# Altium PCB Ethylene Sensor Rev3.PcbDoc
Units mil, origin at the board's own origin, x right, y up, seen from the top; angles counter-clockwise.
Board outline 1745 x 1540 mil, 2 copper layers (Top Layer, Bottom Layer); 24 components, 17 nets, 76 pads, 19 vias.
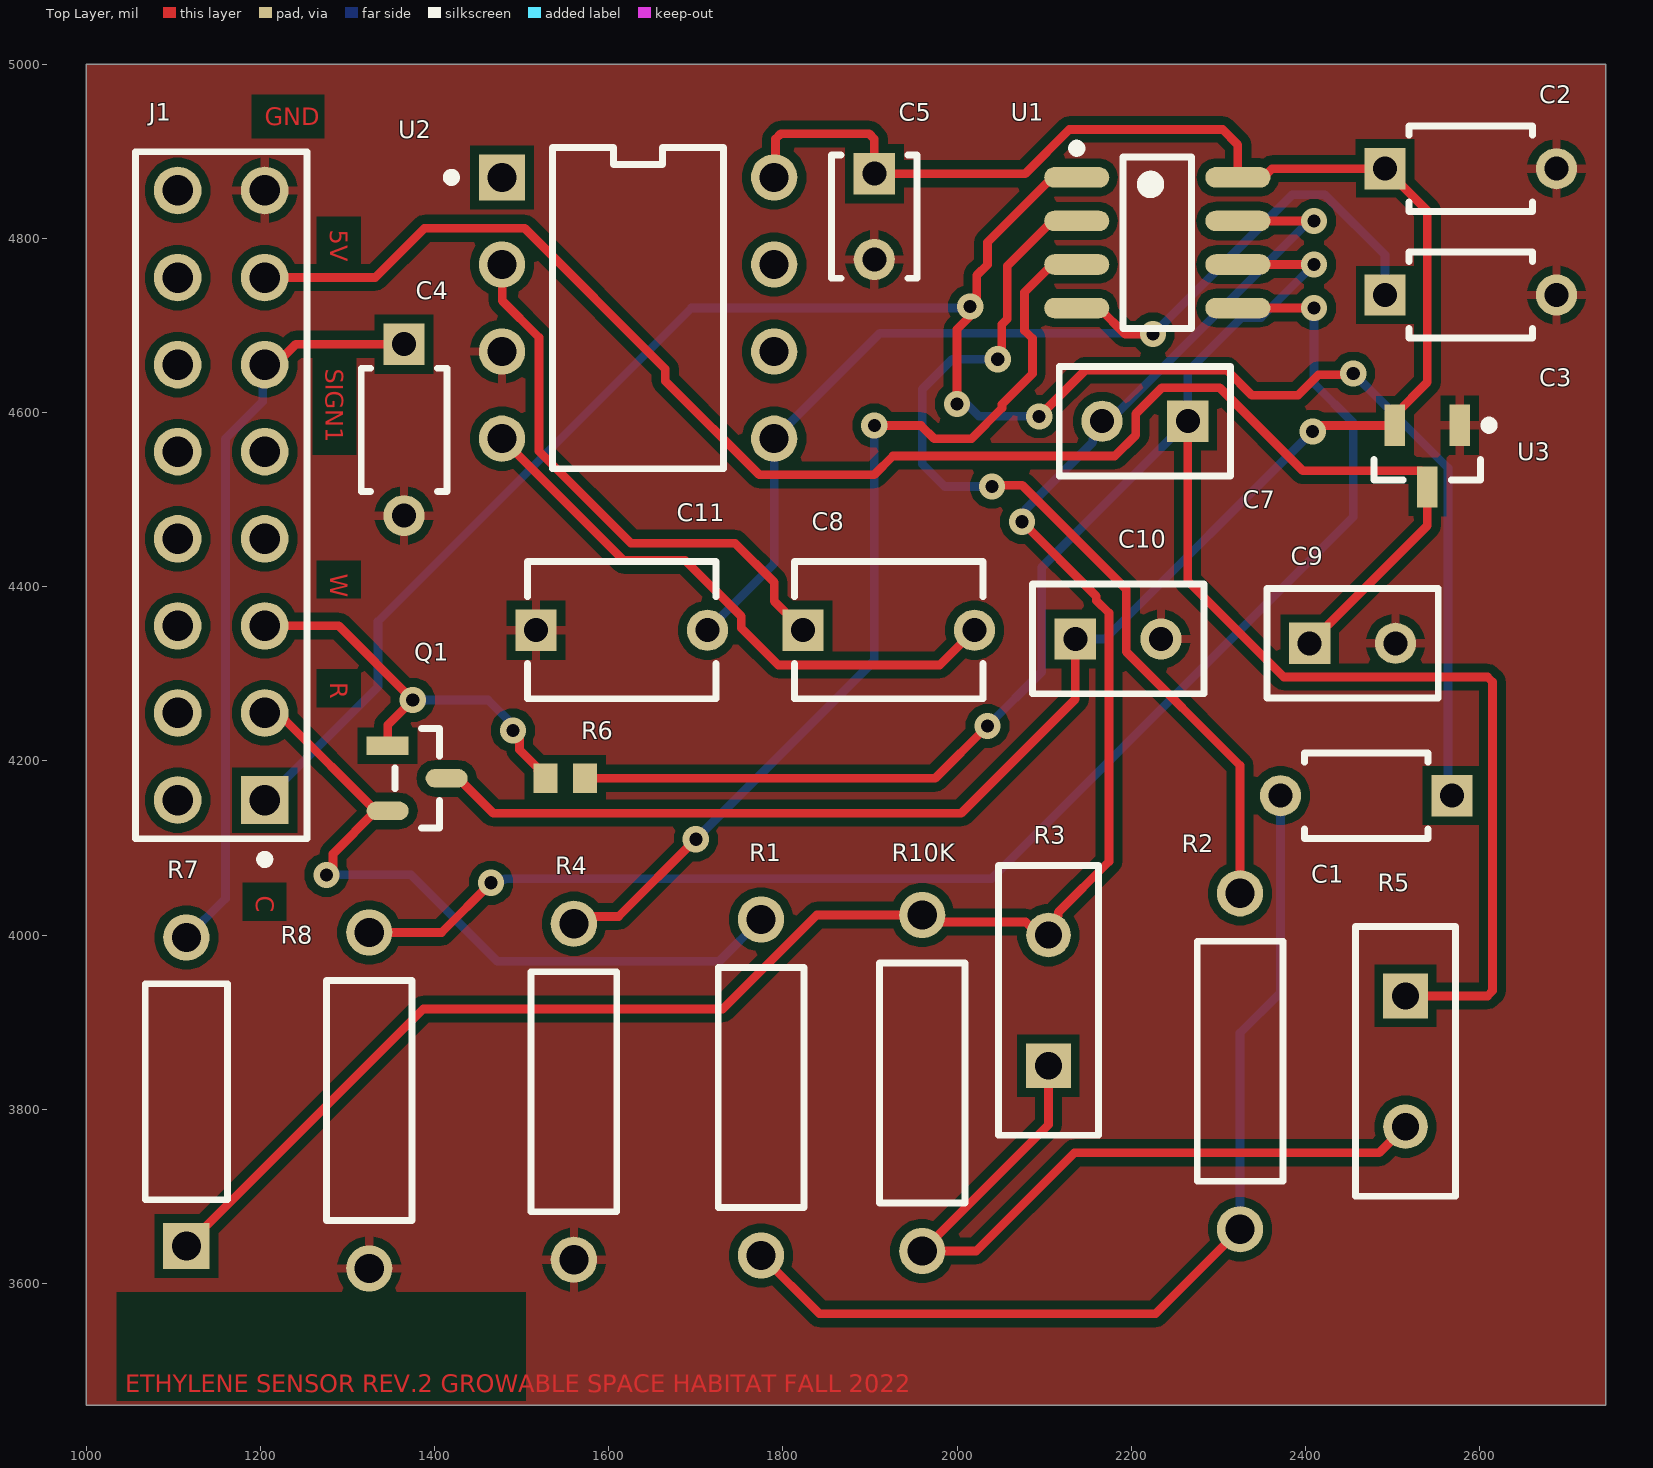
[diagram p0: Top Layer view]
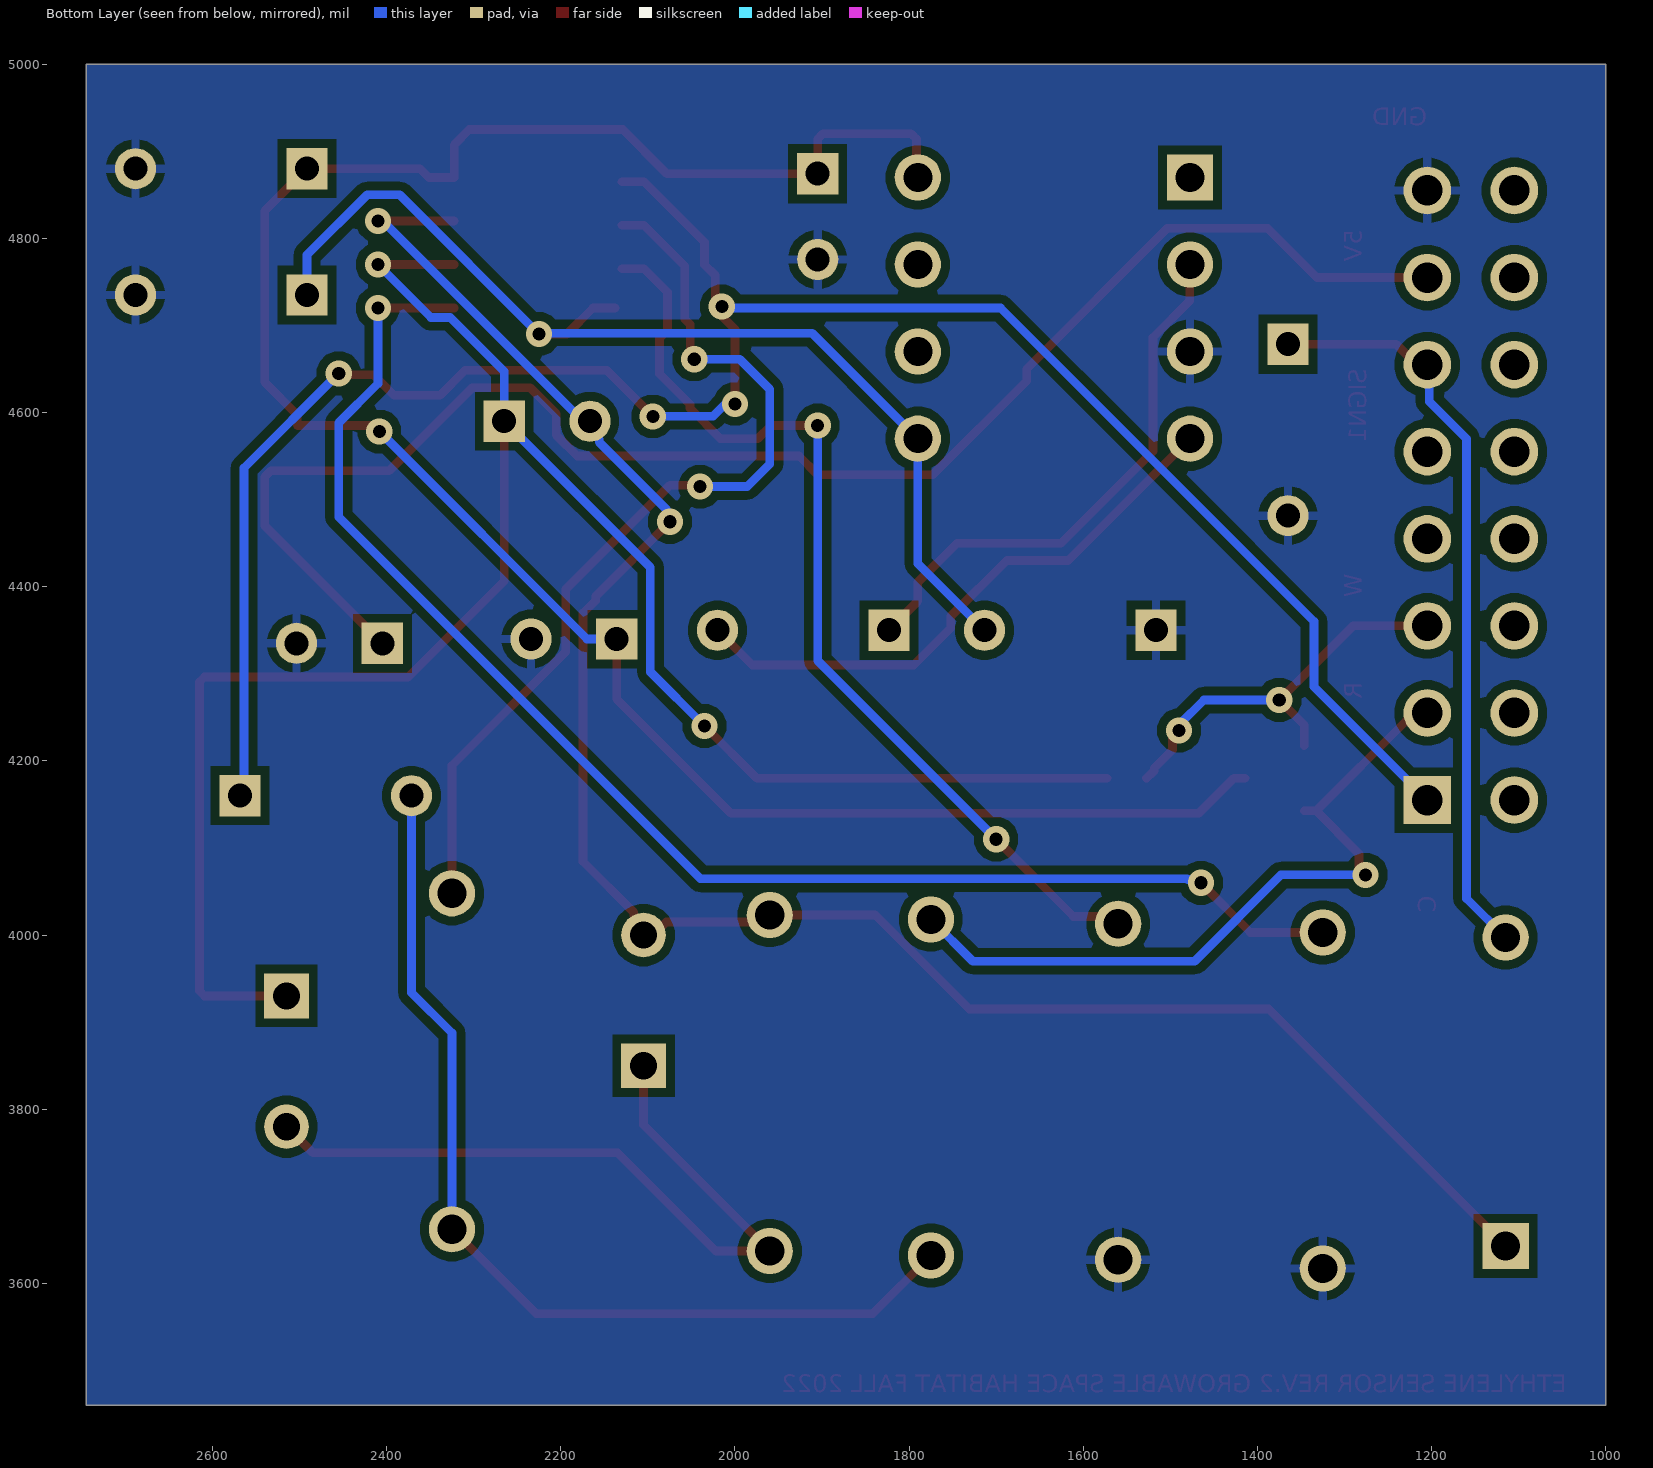
[diagram p1: Bottom Layer view, seen from below]
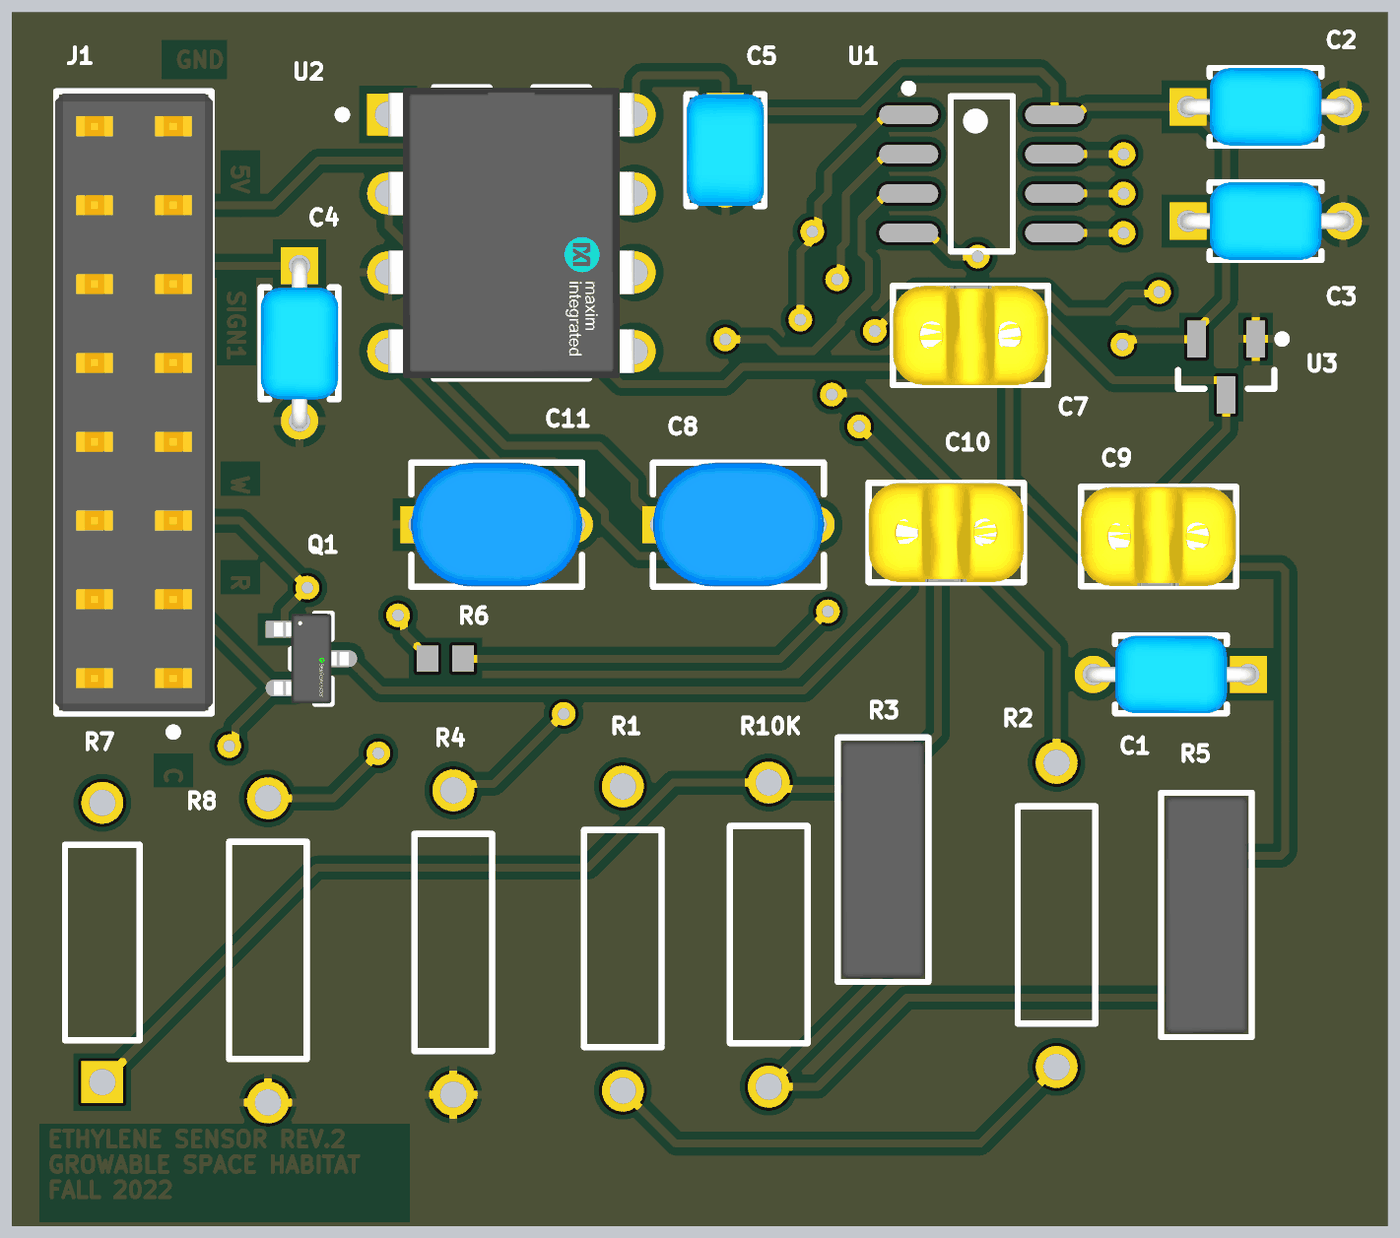
[diagram p2: 3D render of the assembled board from above, using the file's embedded part models]

## Layer stack, top to bottom
Top Solder: solder mask 0.4, Solder Resist, Dk 3.5
Top Layer: signal copper 1.4
Dielectric 1: dielectric 12.6, FR-4, Dk 4.8
Bottom Layer: signal copper 1.4
Bottom Solder: solder mask 0.4, Solder Resist, Dk 3.5

## Board outline
1000,5000 1000,3460 2745,3460 2745,5000

## Design rules (kind name [scope] priority, off if disabled: settings)
Clearance [All] p1: gap=10 ignorepadtopadclearanceinfootprint=FALSE except(0: Arc-Hole Track-Hole SMDPad-Hole THPad-Hole Via-Hole Fill-Hole Poly-Hole Region-Hole Text-Hole)
MinimumSolderMaskSliver [All] p1: minsoldermaskwidth=9.5
PolygonConnect [All] p1: connectstyle=Relief reliefconductorwidth=10 reliefentries=4 polygonreliefangle="90 Angle" airgapwidth=10
RoutingVias [All] p1: holewidth=15 width=30 viastyle="Through Hole" minholewidth=15 minwidth=30 maxholewidth=15 maxwidth=30
SolderMaskExpansion [All] p1: expansion=4 istentingtop=FALSE
Width [All] p1: maxlimit=10 minlimit=10 preferedwidth=10
29 further rules are at their usual default settings.

## Components (designator, comment, footprint, x,y, rotation, side; value= is the part's Value field where it differs from the comment)
C1 ".1uF/100pF" FP-RCE0K1-MFG 2470,4160 r180 top
C2 ".1uF/100pF" FP-RCE0K1-MFG 2590,4880 r0 top
C3 ".1uF/100pF" FP-RCE0K1-MFG 2590,4735 r0 top
C4 ".1uF/100pF" FP-RCE0K1-MFG 1365,4580 r270 top
C5 "100pF/.1uF" FP-RCE0DB-MFG 1905,4825 r270 top
C7 "1uF" FP-K105Z20Y5VF5TL2-MFG 2215.79,4590 r180 top
C8 "10uF" FP-RCE3M1-MFG 1921.57,4350 r0 top
C9 "1uF" FP-K105Z20Y5VF5TL2-MFG 2454.21,4335 r0 top
C10 "1uF" FP-K105Z20Y5VF5TL2-MFG 2185,4340 r0 top
C11 "10uF" FP-RCE3M1-MFG 1615,4350 r0 top
J1 "87227-8" FP-87227-8-MFG 1155,4505 r90 top
Q1 "J177" FP-318-08-IPC_C 1380,4180 r0 top
R1 "10k" OMTE-RES7X2.5-2 1775,3825 r270 top
R2 "10k" OMTE-RES7X2.5-2 2325,3855 r90 top
R3 "20k" FP-S102K-MFG 2105,3925 r90 top
R4 "10k" OMTE-RES7X2.5-2 1560,3820 r90 top
R5 "20k" FP-S102K-MFG 2515,3855 r270 top
R6 "47" RESC1609X50X30LL10T20 1550,4180 r0 top
R7 "100k" RESA60-630X240 1115,3820 r90 top
R8 "10k" OMTE-RES7X2.5-2 1325,3810 r90 top
R10K "10k" OMTE-RES7X2.5-2 1960,3830 r90 top
U1 "AD8572ARZ" ADI-R-8_L 2230,4795 r0 top
U2 "MAX660CPA+" FP-P8-2-MFG 1633.7,4720 r0 top
U3 "MCP1700T-3002E/TT" SOT-23-TT3_L 2540,4550 r270 top

## Footprints (in the part's own frame and the unit in brackets; to place one, negate y for a bottom-side part, rotate by r counter-clockwise, add the part's x,y. Pads: shape width x height; smd on the part's side, far side on the other; paste and mask are expansions set on the pad)
ADI-R-8_L [mm] "SOIC, 8-Leads, Body 4.9x3.9mm, Pitch 1.27mm, IPC High Density"
  oval 1.9x0.6 smd: 1(-2.35,1.905) 2(-2.35,0.635) 3(-2.35,-0.635) 4(-2.35,-1.905) 5(2.35,-1.905) 6(2.35,-0.635) 7(2.35,0.635) 8(2.35,1.905)
  silkscreen extent -2.47,-2.5 1,2.88, body extent -2,-2.5 2,2.5, height 1.75
FP-318-08-IPC_C [mm]
  rect 1.224x0.538 smd paste+0 mask+0: 1(-0.86,0.95)
  rrect100% 1.224x0.538 smd paste+0 mask+0: 2(-0.86,-0.95) 3(0.86,0)
  silkscreen extent -0.65,-1.45 0.65,1.45, body extent -1.57,-1.55 1.57,1.55, height 0.25
FP-87227-8-MFG [mil]
  rect 54.69x54.69 hole 35 paste-39370.1 mask+0: 1(-350,-50)
  round 54.69 hole 35 paste-39370.1 mask+0: 2(-350,50) 3(-250,-50) 4(-250,50) 5(-150,-50) 6(-150,50) 7(-50,-50) 8(-50,50) 9(50,-50) 10(50,50) 11(150,-50) 12(150,50) 13(250,-50) 14(250,50) 15(350,-50) 16(350,50)
  silkscreen extent -423,-99 394,99, body extent -398,-102 398,102, height 10
FP-K105Z20Y5VF5TL2-MFG [mm]
  rect 1.2x1.2 hole 0.7 paste-1000 mask+0: 1(-1.25,0)
  round 1.2 hole 0.7 paste-1000 mask+0: 2(1.25,0)
  silkscreen extent -2.5,-1.6 2.5,1.6, body extent -2.6,-1.7 2.6,1.7, height 0.25
FP-P8-2-MFG [mm]
  rect 1.35x1.35 hole 0.85 paste-1000 mask+0: 1(-3.97,3.81)
  round 1.35 hole 0.85 paste-1000 mask+0: 2(-3.97,1.27) 3(-3.97,-1.27) 4(-3.97,-3.81) 5(3.97,-3.81) 6(3.97,-1.27) 7(3.97,1.27) 8(3.97,3.81)
  silkscreen extent -5.57,-4.69 2.49,4.69, body extent -4.74,-5.13 4.74,5.13, height 0.25
FP-RCE0DB-MFG [mm]
  rect 1.2x1.2 hole 0.7 paste-1000 mask+0: 1(-1.25,0)
  round 1.2 hole 0.7 paste-1000 mask+0: 2(1.25,0)
  silkscreen extent -1.8,-1.25 1.8,1.25, body extent -1.95,-1.35 1.95,1.35, height 0.25
FP-RCE0K1-MFG [mm]
  rect 1.2x1.2 hole 0.7 paste-1000 mask+0: 1(-2.5,0)
  round 1.2 hole 0.7 paste-1000 mask+0: 2(2.5,0)
  silkscreen extent -1.8,-1.25 1.8,1.25, body extent -3.2,-1.35 3.2,1.35, height 0.25
FP-RCE3M1-MFG [mm]
  rect 1.2x1.2 hole 0.7 paste-1000 mask+0: 1(-2.5,0)
  round 1.2 hole 0.7 paste-1000 mask+0: 2(2.5,0)
  silkscreen extent -2.75,-2 2.75,2, body extent -3.2,-2.1 3.2,2.1, height 0.25
FP-S102K-MFG [mm]
  rect 1.3x1.3 hole 0.8 paste-1000 mask+0: 1(-1.905,0)
  round 1.3 hole 0.8 paste-1000 mask+0: 2(1.905,0)
  silkscreen extent -3.94,-1.46 3.94,1.46, body extent -4.04,-1.56 4.04,1.56, height 0.25
OMTE-RES7X2.5-2 [mm] "Resistor, Axial; Body 7x2.5mm, Lead Dia. 0.6mm"
  round 1.35 hole 0.85: 1(-4.9,0) 2(4.9,0)
  silkscreen extent -3.5,-1.25 3.5,1.25, body extent -3.5,-1.25 3.5,1.25, height 2.5
RESA60-630X240 [mm] "Axial Resistor, 2-Leads, Dia 2.4mm, Body Length 6.3mm"
  rect 1.35x1.35 hole 0.85: 1(-4.5,0)
  round 1.35 hole 0.85: 2(4.5,0)
  silkscreen extent -3.15,-1.2 3.15,1.2, body extent -3.15,-1.2 3.15,1.2, height 2.4
RESC1609X50X30LL10T20 [mm] "Chip Resistor, 2-Leads, Body 1.55x0.85mm, IPC High Density"
  rect 0.7x0.85 smd: 1(-0.575,0) 2(0.575,0)
  body extent -0.82,-0.48 0.82,0.48, height 0.5
SOT-23-TT3_L [mm] "SOT23, 3-Leads, Body 2.9x1.3mm, Pitch 0.95mm, Lead Span 2.4mm, IPC High Density"
  rect 1.2x0.6 smd: 1(-0.9,0.95) 2(-0.9,-0.95) 3(0.9,0)
  silkscreen extent -1.02,-1.55 0.7,1.93, body extent -0.7,-1.52 0.7,1.53, height 1.12

## Part data
C1 C2 C3 C4: library part CMP-06035-023108-1, "Cap Ceramic 100pF 100V C0G ±5% Radial 5mm +125°C Automotive Bulk", Capacitance=100pF, Case/Package=Radial, Dielectric=C0G, Max Operating Temperature=125°C, Min Operating Temperature=-55°C, Package Quantity=2000, Ratings=AEC-Q200, Resistor Type=Ceramic, Tolerance=5%, Voltage Rating=100V, Height=3.5mm, Height - Seated (Max)=0.138inch, Lead Diameter=0.5mm, Lead Pitch=0.197inch, Lead/Base Style="Formed Leads", Length=0.142inch, Mount="Through Hole", Packaging="Tape and Reel", Termination=Radial, Voltage Rating (DC)=100V, Width=0.098inch
C5: library part CMP-06035-022164-1, "Cap Ceramic 100pF 100V C0G ±5% Radial 2.5mm +125°C Ammo Pack", Capacitance=100pF, Case/Package=Radial, Dielectric=C0G, Max Operating Temperature=125°C, Min Operating Temperature=-55°C, Package Quantity=2000, Ratings=AEC-Q200, Resistor Type=Ceramic, Tolerance=5%, Voltage Rating=100V, Height=3.5mm, Height - Seated (Max)=0.138inch, Lead Diameter=0.5mm, Lead Pitch=0.098inch, Lead/Base Style=Straight, Length=0.142inch, Mount="Through Hole", Packaging="Tape and Reel", Termination=Radial, Voltage Rating (DC)=100V, Width=0.098inch
C7 C9 C10: library part CMP-02417-000003-1, "CAP CER 1UF 50V Y5V RADIAL", Manufacturer="Vishay BC Components", Manufacturer Part Number=K105Z20Y5VF5TL2, Temperature="-30°C to +85°C", Temperature Characteristic=Y5V, Temperature Range High=+85°C, Temperature Range Low=-30°C, Tolerance=-20+80%, Voltage Rating=50V, Automotive=No, Capacitance=1uF, Category=Cap, ComponentLink2Description=Datasheet, ComponentLink2URL=https://www.vishay.com/docs/45171/kseries.pdf, Device Class L1="Passive Components", Device Class L2=Capacitors, Device Class L3="Ceramic Capacitors", Digikey Description="CAP CER 1UF 50V Y5V RADIAL", Height=6.6mm, Lead Free=Yes, Material=Ceramic, Mouser Description="Multilayer Ceramic Capacitors MLCC - Leaded 1uF 50volts +80/-20% Y5V 2.5mm LS", Octopart=https://octopart.com/k105z20y5vf5tl2-vishay-39475252, Package=K105Z20Y5VF5TL2, RoHS=TRUE
C8 C11: library part CMP-06035-005744-1, "Cap Ceramic 10uF 25V X7R ±10% Radial 5mm +125°C Automotive Ammo Pack", Case/Package=Radial, Dielectric=X7R, Max Operating Temperature=125°C, Min Operating Temperature=-55°C, Package Quantity=1500, Ratings=AEC-Q200, Resistor Type=Ceramic, Tolerance=10%, Voltage Rating=25V, Capacitance=10uF, Height=5mm, Height - Seated (Max)=0.197inch, Lead Diameter=0.5mm, Lead Pitch=0.197inch, Lead/Base Style="Formed Leads", Length=0.217inch, Mount="Through Hole", Packaging="Tape and Reel", Termination=Radial, Voltage Rating (DC)=25V, Width=0.157inch
J1: library part CMP-03369-000064-1, "CONN HEADER VERT 16POS 2.54MM", Current Rating=3A, Manufacturer="TE Connectivity", Package=0, Temperature="-65°C to +105°C", Temperature Range High=+105°C, Temperature Range Low=-65°C, Automotive=No, Category=Conn, ComponentLink2Description=Datasheet, ComponentLink2URL=https://www.te.com/usa-en/product-87227-8.datasheet.pdf, Conn Gender=Male, Conn Orientation=Straight, Contact Material=Gold,Nickel, Device Class L1=Connectors, Device Class L2="Headers and Wire Housings", Device Class L3=unset, Digikey Description="CONN HEADER VERT 16POS 2.54MM", Footprint Url=https://www.te.com/commerce/DocumentDelivery/DDEController?Action=showdoc&DocId=Customer+Drawing%7F87227%7FH4%7Fpdf%7FEnglish%7FENG_CD_87227_H4.pdf%7F87227-8, Height=0.428inch, Lead Free=Yes, Manufacturer Part Number=87227-8, Mouser Description="Headers & Wire Housings UNSHRD VERT DUAL 16", Number of Contacts=16, Number of Rows=2, Octopart=https://octopart.com/87227-8-te+connectivity-39407754, Pitch=2.54mm, RoHS=TRUE
Q1: library part CMP-1062-00047-2, "JFET P-CH 30V 0.225W SOT23", Breakdown Voltage=30V, Case/Package=SOT-23-3, Continuous Drain Current (ID)=20mA, Current Rating=-20mA, Drain to Source Resistance=300R, Drain to Source Voltage (Vdss)=25V, Input Capacitance=11pF, Max Operating Temperature=150°C, Max Power Dissipation=225mW, Min Operating Temperature=-55°C, Package Quantity=1, Voltage Rating (DC)=-25V, Contact Plating=Tin, Element Configuration=Single, Gate to Source Voltage (Vgs)=25V, Halogen Free="Halogen Free", Height=1.01mm, Lead Free="Lead Free", Length=3.04mm, Number of Pins=3, Packaging="Tape and Reel", Power Dissipation=225mW, Radiation Hardening=No, REACH SVHC="No SVHC", Weight=0.050717oz, Width=1.4mm
R1 R2 R4 R8 R10K: library part CMP-2000-06865-1, "Little Demon(R) Carbon Composition Molded OD Series, 250 V, 10 KOhm, +/-5%, -70 to 130 degC, 2-Pin THD, RoHS, Bulk", Manufacturer=Ohmite, Operating Temperature=-, Package / Case=Axial, Package Description="2-Pin THD Resistor, Body 7 x 2.5 mm, Lead Dia. 0.6 mm", Package Reference=RES7X2.5, PartNumber=OD103JE, Power (Watts)=0.25W,1/4W, Power Rating=0.25W, Standard Package=100, Tolerance=±5%, Catalog Drawings=OD,OF,OASeries, Category=Resistors, Composition=CarbonComposition, Datasheet URL=http://www.ohmite.com/cat/res_od_of_oa.pdf, Datasheet Version=06/2016, EDA / CAD Models=DownloadfromAcceleratedDesigns, Family=ThroughHoleResistors, Features=PulseWithstanding, Height=-, Manufacturer URL=http://www.ohmite.com/, Mounting Technology=ThroughHole, Number of Terminations=2, Online Catalog=OD,OF,OASeries,LittleDemon®, Packaging=Bulk, Resistance (Ohms)=10k, RoHS Information="LittleDemon\"E\"SeriesMaterialDeclaration", Series=LittleDemon®OD, Size / Dimension="0.098\"Diax0.276\"L(2.50mmx7.00mm)", Supplier Device Package=Axial, Temperature Coefficient=-
R3 R5: library part CMP-10850-000015-1, "RES 20K OHM 0.6W 0.01% RADIAL", Case/Package=Radial, Power Rating=600mW, Resistance=20kR, Resistance Tolerance=0.01%, Resistor Type="Metal Foil", Temperature Coefficient=1ppm/°C, Voltage Rating=300V, Mount="Through Hole", RoHS Compliant=Yes, Tolerance=0.01%
R6: library part CMP-2000-03383-1, Manufacturer="Vishay Dale", Part Number=CRCW060347R0FKEA
R7: library part CMP-1659-00073-1, "Axial Resistor, 100 KOhm, +/- 1%, 0.25 W, -55 to 155 degC, 2-Pin THD, RoHS, Bulk", Case\Package=Axial, Max Operating Temperature="155 degC", Min Operating Temperature="-55 degC", Package Quantity=200, Power Rating="250 mW", Resistance="475 Ohm", Tolerance=1%, Voltage Rating="250 V", ComponentLink1Description="Manufacturer URL", ComponentLink1URL=http://www.yageo.com/, ComponentLink2Description=Datasheet, ComponentLink2URL=http://www.yageo.com/documents/recent/Yageo%20LR_MFR_2013.pdf, DatasheetVersion=Apr-13, Length="0.248 inch", Mount="Through Hole", PackageDescription="2-Pin Axial Lead, Dia 2.4 mm, Body Length 6.3 mm", PackageReference=MFR-25, Packaging=Bulk, RoHSCompliant=true
U1: library part CMP-0384-00919-1, "Double Channel Rail-to-Rail Operational Amplifier, 1.5 MHz BW, 400 mV/us SR, Industrial, 8-pin SOIC (R-8), Tube", Amplifiers Per Package=2, Generic Part Number=AD8572, Input Bias Current=10pA, Input Offset Voltage=1uV, Manufacturer="Analog Devices", Code_JEDEC=MS-012-AA, ComponentLink1Description="Manufacturer URL", ComponentLink1URL=http://www.analog.com/en/index.html, ComponentLink2Description=Datasheet, ComponentLink2URL=http://www.analog.com/static/imported-files/data_sheets/AD8571_8572_8574.pdf, ComponentLink3Description="Package Specification", ComponentLink3URL=http://www.analog.com/static/imported-files/packages/PKG_PDF/SOIC_Narrow%20(R)/R_8.pdf, DatasheetVersion="Rev. E", Iq/Amp=975uA, Mounting Technology="Surface Mount", PackageDescription="8-Pin Standard Small Outline Package, Body 3.9 x 4.9 mm, Pitch 1.27 mm", PackageReference=R-8, PackageVersion=060506-A, PartNumber=AD8572ARZ, Slew Rate=400mV/us, Small Signal Bandwidth=1.5MHz, V Span Max=6V, V Span Min=2.7V
U2: library part CMP-05722-000022-1, "IC REG CHARG PUMP INV 100MA 8DIP", Manufacturer="Maxim Integrated", Max Power Dissipation=727mW, Max Supply Voltage=5.5V, Min Supply Voltage=1.5V, Negative Voltage Available=true, Nominal Supply Current=0.12-1mA, Output Current=100mA, Output Voltage=-5.5/+11V, Package=P8-2, Switching Frequency=10/80kHz, Temperature="0°C to +70°C", Temperature Range High=+70°C, Temperature Range Low=0°C, Automotive=No, Category=IC, ComponentLink2Description=Datasheet, ComponentLink2URL=https://datasheets.maximintegrated.com/en/ds/MAX660.pdf, Device Class L1="Integrated Circuits (ICs)", Device Class L2="Power Management ICs", Device Class L3="Voltage Regulators - Switching", Digikey Description="IC REG CHARG PUMP INV 100MA 8DIP", Footprint Url=https://pdfserv.maximintegrated.com/package_dwgs/21-0043.PDF, Height=4.572mm, Lead Free=Yes, Manufacturer Part Number=MAX660CPA+, Mouser Description="Voltage Regulators - Switching Regulators CMOS Monolithic Voltage Converter", Number of Outputs=1, Octopart=https://octopart.com/max660cpa%2B-maxim+integrated-39427913, Output Type=Other, RoHS=TRUE, Standoff Height=0.38mm, Switching Topology="Charge Pump"
U3: library part CMP-0136-00788-1, "Low Quiescent Current LDO, 3-Pin SOT-23, Extended Temperature, Tape and Reel", Code_IPC=SOT23-3, DatasheetVersion="revB, Feb-2007", PackageDescription="3-Lead Plastic Small Outline Transistor (TT) [SOT-23]", PackageReference=SOT-23-TT3, PackageVersion="revBB, Aug-2009"

## Via types
v1: diameter 30, hole 15, Top Layer to Bottom Layer, 19 vias

## Nets (pads, with @x,y where several pads share a name; then routed paths per layer and width w, separated by ;. In a path a pad name is that pad's centre, name@x,y a point inside that pad or via, vN(x,y) a via of type N, cw(c..) or ccw(c..) an arc to the next point about the centre after c; other vN are vias at no path point)
3V: C2.1 C5.1 C10.1 Q1.3 U1.8 U2.8 U3.2 | length 2528.1
  Top Layer w10: Q1.3 1427.37,4180 1467.37,4140 2005,4140 2135.79,4270.79 C10.1 ; U2.8 1791.57,4871.57 1791.57,4914.14 1797.43,4920 1899.14,4920 1905,4914.14 C5.1 2078.19,4874.21 2128.97,4925 2305,4925 2322.52,4907.48 U1.8 2351.8,4870 2361.8,4880 C2.1 2540,4831.57 2540,4634.65 2502.6,4597.24 U3.2 2502.17,4585 2415,4585 v1(2408.43,4578.43)
  Bottom Layer w10: C5.1 C5.1@1910.79,4880 ; C10.1 2170,4340 v1(2408.43,4578.43)
5V: C9.1 J1.13 U3.3 | length 1829.4
  Top Layer w10: J1.13 1331.97,4755 1388.55,4811.57 1503.43,4811.57 1665,4650 1665,4636.2 1772.78,4528.43 1904.99,4528.43 1926.57,4550 2181.19,4550 2205.2,4574 2205.2,4598.65 2235.16,4628.62 2301.67,4628.62 2397.11,4533.19 2533.19,4533.19 2540,4526.38 2540,4470 C9.1
-3V: C3.1 C11.2 U1.4 U2.5 | length 1244.7
  Top Layer w10: U1.4 2163.07,4720 2193.07,4690 v1(2225,4690)
  Bottom Layer w10: C11.2 1790,4426.57 U2.5 1911.17,4691.17 2223.83,4691.17 v1(2225,4690) 2385,4850 2422.43,4850 2491.57,4780.85 C3.1
GND: C2.2 C3.2 C4.2 C5.2 C9.2 C10.2 C11.1 J1.15 R4.1 R8.1 U2.3 U3.1
NetC1_1: C1.1 J1.1 U1.1 | length 2447.8
  Top Layer w10: v1(2000,4610) 2000,4695.7 2015.14,4710.84 v1(2015.14,4721.66) 2022.79,4729.32 2022.79,4757.6 2035,4769.81 2035,4795.63 2104.37,4865 U1.1@2129.96,4865 ; v1(2094.37,4595.63) 2147.36,4648.62 2309.96,4648.62 2338.58,4620 2391.57,4620 2415,4643.43 2453.43,4643.43 v1(2455,4645)
  Bottom Layer w10: J1.1 1335,4285 1335,4360 1695,4720 2013.48,4720 v1(2015.14,4721.66) ; v1(2000,4610) 2010.82,4610 2025.19,4595.63 v1(2094.37,4595.63) ; v1(2455,4645) 2563.78,4536.22 C1.1@2563.78,4160
NetC1_2: C1.2 R1.2 R2.1 | length 1135.2
  Top Layer w10: R1.2 1842.09,3565 2227.91,3565 R2.1
  Bottom Layer w10: R2.1 2325,3887.49 2371.57,3934.07 C1.2
NetC7_1: C7.1 R5.1 R6.2 U1.6 | length 2311.6
  Top Layer w10: R6.2 1975,4180 v1(2035,4240) ; C7.1 2265,4406.54 2375.16,4296.38 2609.14,4296.38 2615,4290.52 2615,3935.86 2609.14,3930 R5.1 ; U1.6 v1(2410,4770)
  Bottom Layer w10: v1(2035,4240) 2097.17,4302.17 2097.17,4422.17 C7.1 2265,4647.17 2327,4709.17 2349.17,4709.17 v1(2410,4770)
NetC7_2: C7.2 R3.2 R7.1 R10K.2 U1.7 | length 2281.3
  Top Layer w10: R7.1 1387.17,3915 1730.88,3915 1838.8,4022.91 R10K.2 1967.91,4015 2078.86,4015 2093.86,4000 R3.2 2105,4011.14 2116.2,4022.35 2116.2,4026.2 2174.41,4084.41 2174.41,4369.84 2160,4384.24 2160,4389.14 v1(2074.57,4474.57) ; U1.7 v1(2410,4820)
  Bottom Layer w10: v1(2074.57,4474.57) 2078.4,4478.4 2078.4,4488.4 2155.98,4565.98 2155.98,4569.32 2166.57,4579.92 C7.2 2174.59,4590 2404.59,4820 v1(2410,4820)
NetC8_1: C8.1 U2.2 | length 633.1
  Top Layer w10: U2.2 1477.77,4769.63 1477.77,4728.43 1520,4686.2 1520,4555.69 1625.69,4450 1745,4450 1790,4405 1790,4383.15 C8.1
NetC8_2: C8.2 U2.4 | length 674.7
  Top Layer w10: U2.4 1617.4,4430 1688.05,4430 1752.05,4366 1752.05,4352.64 1794.69,4310 1980,4310 C8.2
NetJ1_3: J1.3 Q1.2 R1.1 | length 844.7
  Top Layer w10: J1.3 1213.55,4246.45 1228.77,4246.45 Q1.2@1332.63,4142.6 ; v1(1275.86,4069.14) 1283.51,4076.79 1283.51,4093.49 Q1.2@1332.63,4142.6 ; Q1.2 Q1.2@1332.63,4142.6
  Bottom Layer w10: v1(1275.86,4069.14) 1372.92,4069.14 1472.06,3970 1727.09,3970 R1.1
NetJ1_5: J1.5 Q1.1 R6.1 | length 473.5
  Top Layer w10: J1.5 1290,4355 v1(1375,4270) 1346.13,4241.13 Q1.1 ; v1(1490,4235) 1497.65,4227.35 1497.65,4212.66 1518.58,4191.73 1518.58,4188.78 R6.1
  Bottom Layer w10: v1(1375,4270) 1461.36,4270 1490,4241.36 v1(1490,4235)
NetR2_2: R2.2 U1.2 | length 1088.7
  Top Layer w10: v1(2040,4515) 2041.57,4516.57 2075,4516.57 2194.41,4397.16 2194.41,4325.18 2325,4194.59 R2.2 ; v1(2046.77,4661.17) 2051.21,4665.61 2051.21,4701.17 2057.56,4707.52 2057.56,4768.19 2104.37,4815 U1.2@2129.96,4815
  Bottom Layer w10: v1(2040,4515) 1985.82,4515 1960,4540.82 1960,4626.57 1994.6,4661.17 v1(2046.77,4661.17)
NetR3_1: R3.1 R5.2 R10K.1 | length 887.2
  Top Layer w10: R3.1 2105,3782.09 R10K.1 2022.09,3637.09 2135,3750 2485,3750 R5.2
NetR4_2: R4.2 U1.3 | length 1122.5
  Top Layer w10: R4.2 1568.26,4021.17 1611.17,4021.17 v1(1700,4110) ; v1(1905,4585) 1958.7,4585 1973.7,4570 2016.57,4570 2051.67,4605.1 2051.67,4609.5 2086.77,4644.6 2086.77,4684.95 2077.56,4694.15 2077.56,4738.19 2104.37,4765 U1.3@2129.96,4765
  Bottom Layer w10: v1(1700,4110) 1905,4315 v1(1905,4585)
NetR8_2: R8.2 U1.5 | length 1673.7
  Top Layer w10: R8.2 1407.91,4002.91 v1(1465,4060) ; U1.5 v1(2410,4720)
  Bottom Layer w10: v1(1465,4060) 1468.83,4063.83 1480.2,4063.83 1480.86,4064.49 1960,4064.49 2039.49,4064.49 2455,4480 2455,4588.43 2410,4633.43 v1(2410,4720)
SIGN1: C4.1 J1.11 R7.2 | length 864.8
  Top Layer w10: J1.11 1217.09,4655 1240.52,4678.43 C4.1
  Bottom Layer w10: R7.2 1159.85,4042.02 1159.85,4569.73 1202.78,4612.66 1202.78,4652.78 J1.11
pads on no net: J1.2 J1.4 J1.6 J1.7 J1.8 J1.9 J1.10 J1.12 J1.14 J1.16 U2.1 U2.6 U2.7

## Polygon pours and split planes (outlines as drawn)
GND on Top Layer "1-GND" (solid, pour order 0): 1000,5000 2745,5000 2745,3460 1000,3460
GND on Bottom Layer "2-GND" (solid, pour order 1): 1000,5000 2745,5000 2745,3460 1000,3460

## Other copper
Top Layer:
  text "GND" at 1205,4930 h20
  text "5V" at 1280,4810 h20 r270
  text "SIGN1" at 1275,4650 h20 r270
  text "W" at 1280,4415 h20 r270
  text "R" at 1280,4290 h20 r270
  text "C" at 1195,4045 h20 r270
  text "ETHYLENE SENSOR REV.2 GROWABLE SPACE HABITAT FALL 2022" at 1045,3475 h20